# Altium PCB PCB1.PcbDoc
Units mm, origin at the board's own origin, x right, y up, seen from the top; angles counter-clockwise.
Board outline 133.22 x 81.28 mm, 2 copper layers (Top Layer, Bottom Layer); 62 components, 31 nets, 242 pads, 0 vias.
Unrouted connection lines stored in the file: 36.
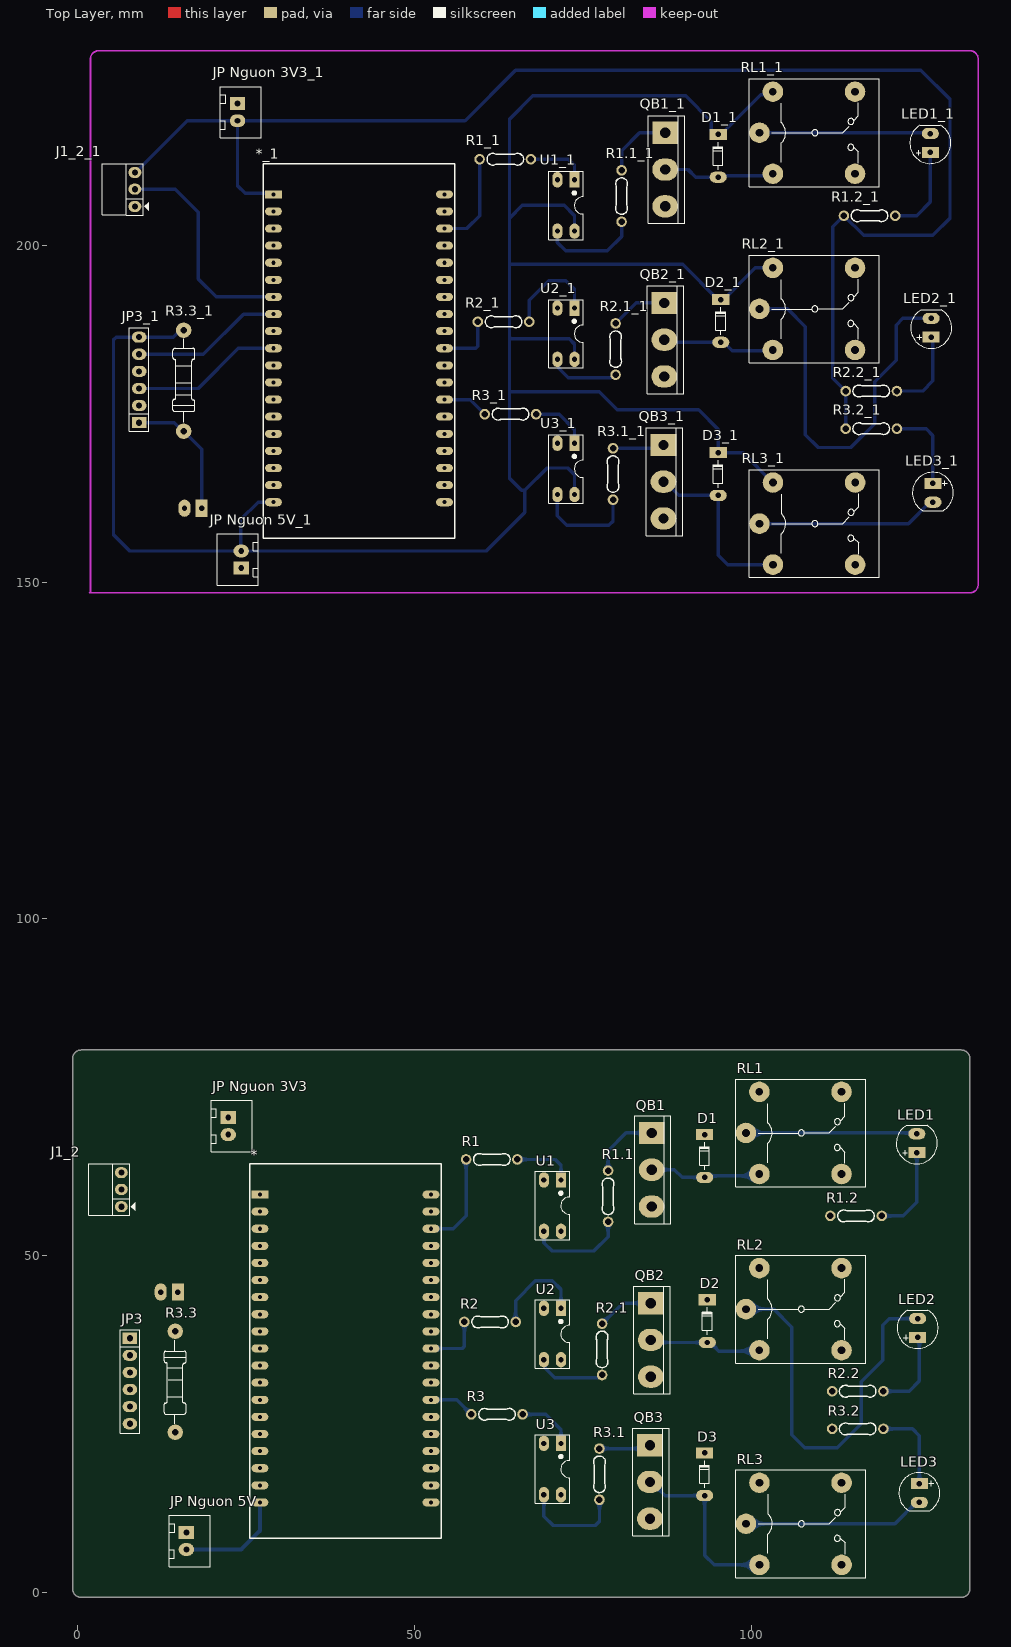
[diagram p0: Top Layer view]
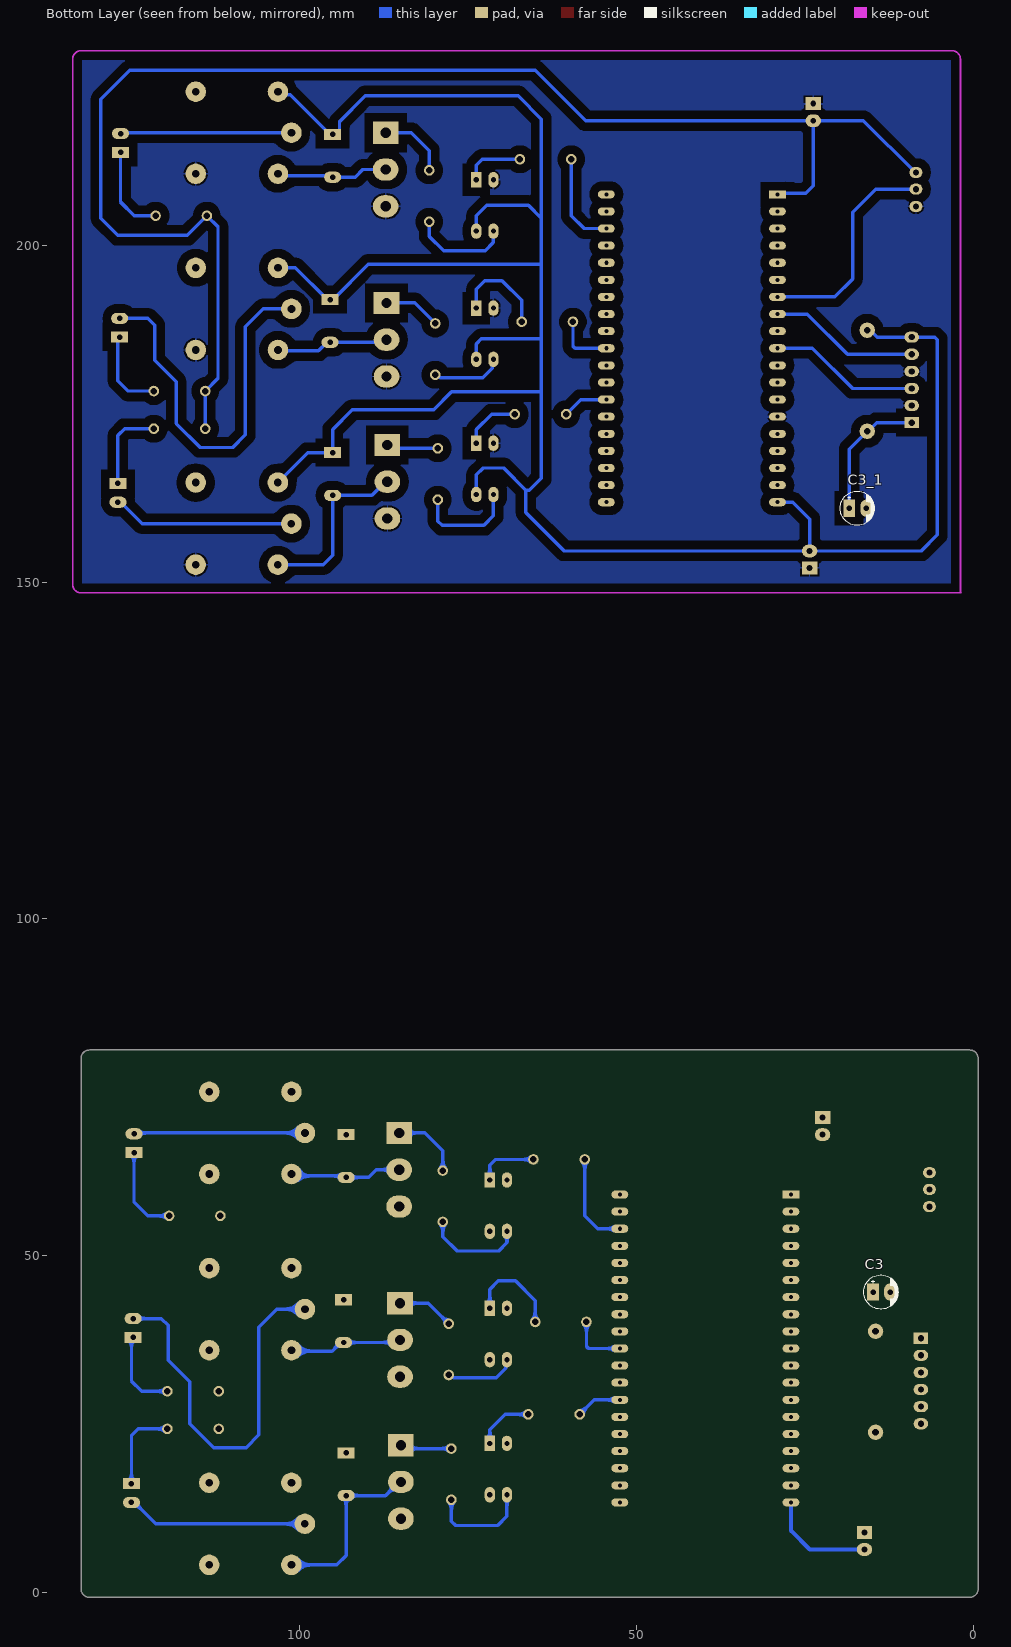
[diagram p1: Bottom Layer view, seen from below]

## Layer stack, top to bottom
Top Solder: solder mask 0.0102, Solder Resist, Dk 3.5
Top Layer: signal copper 0.0356
Dielectric 1: dielectric 0.32, FR-4, Dk 4.8
Bottom Layer: signal copper 0.0356
Bottom Solder: solder mask 0.0102, Solder Resist, Dk 3.5

## Board outline
-0.762,0.508 -0.762,79.248 cw(c0.508,79.248) 0.508,80.518 131.191,80.518 cw(c131.191,79.248) 132.461,79.248 132.461,0.508 cw(c131.191,0.508) 131.191,-0.762 0.508,-0.762 cw(c0.508,0.508)

## Design rules (kind name [scope] priority, off if disabled: settings)
Clearance [All] p1: gap=1.3 ignorepadtopadclearanceinfootprint=FALSE
PolygonConnect [All] p1: connectstyle=Relief reliefconductorwidth=0.254 reliefentries=4 polygonreliefangle="90 Angle" airgapwidth=0.254
RoutingVias [All] p1: holewidth=20 width=35 viastyle="Through Hole" minholewidth=15 minwidth=25 maxholewidth=0.711 maxwidth=0
SolderMaskExpansion [All] p1: expansion=0.102 istentingtop=FALSE
Width [All] p1: maxlimit=1.27 minlimit=0.381 preferedwidth=0.635
30 further rules are at their usual default settings.

## Classes and differential pairs
component class Sheet1: C3 D1 D2 D3 J1_2 JP3 "JP Nguon 3V3" "JP Nguon 5V" LED1 LED2 LED3 QB1 QB2 QB3 R1 R1.1 R1.2 R2 R2.1 R2.2 R3 R3.1 R3.2 R3.3 RL2 RL3 U1 U2 U3

## Components (designator, comment, footprint, x,y, rotation, side; value= is the part's Value field where it differs from the comment)
* "ESP32 DEV KIT" "ESP32 DEVKIT" 27.051,59.055 r0 top
*_1 "ESP32 DEV KIT" "ESP32 DEVKIT" 29.058,207.572 r0 top (schematic designator *)
C3 "220uF" CP1/2 14.859,44.577 r180 bottom value=10uF/50V
C3_1 "220uF" CP1/2 18.39,160.963 r180 bottom value=10uF/50V (schematic designator C3)
D1 "1N4007" D0.5A 93.091,64.77 r270 top
D1_1 "1N4007" D0.5A 95.098,213.287 r270 top (schematic designator D1)
D2 "1N4007" D0.5A 93.472,40.259 r270 top
D2_1 "1N4007" D0.5A 95.479,188.776 r270 top (schematic designator D2)
D3 "1N4007" D0.5A 93.091,17.526 r270 top
D3_1 "1N4007" D0.5A 95.098,166.043 r270 top (schematic designator D3)
J1_2 "DHT11" JP3H 6.477,57.252 r90 top value=J3
J1_2_1 "DHT11" JP3H 8.484,205.769 r90 top value=J3 (schematic designator J1_2)
JP3 "SharpGP2Y10" JP6 7.747,37.719 r270 top value=JP7
JP3_1 "SharpGP2Y10" JP6 9.119,173.663 r90 top value=JP7 (schematic designator JP3)
"JP Nguon 3V3" "JP2" CON2 22.352,70.485 r270 top value="Connector 2"
"JP Nguon 3V3_1" "JP2" CON2 23.724,221.034 r270 top value="Connector 2" (schematic designator "JP Nguon 3V3")
"JP Nguon 5V" "JP2" CON2 16.129,8.89 r270 top value="Connector 2"
"JP Nguon 5V_1" "JP2" CON2 24.271,152.073 r90 top value="Connector 2" (schematic designator "JP Nguon 5V")
LED1 "LED" LED-5TRED 124.587,66.675 r90 top value="LED 3 ly Single Colour"
LED1_1 "LED" LED-5TRED 126.594,215.192 r90 top value="LED 3 ly Single Colour" (schematic designator LED1)
LED2 "LED" LED-5TRED 124.714,39.243 r90 top value="LED 3 ly Single Colour"
LED2_1 "LED" LED-5TRED 126.721,187.76 r90 top value="LED 3 ly Single Colour" (schematic designator LED2)
LED3 "LED" LED-5TRED 124.968,14.732 r270 top value="LED 3 ly Single Colour"
LED3_1 "LED" LED-5TRED 126.975,163.249 r270 top value="LED 3 ly Single Colour" (schematic designator LED3)
QB1 "C1815" QTO-247 85.217,68.199 r270 top value=D718
QB1_1 "C1815" QTO-247 87.224,216.716 r270 top value=D718 (schematic designator QB1)
QB2 "C1815" QTO-247 85.09,42.926 r270 top value=D718
QB2_1 "C1815" QTO-247 87.097,191.443 r270 top value=D718 (schematic designator QB2)
QB3 "C1815" QTO-247 84.963,21.844 r270 top value=D718
QB3_1 "C1815" QTO-247 86.97,170.361 r270 top value=D718 (schematic designator QB3)
R1 "1K" "R 1/4W/300" 57.658,64.262 r0 top
R1.1 "1K" "R 1/4W/300" 78.74,62.611 r270 top
R1.1_1 "1K" "R 1/4W/300" 80.747,211.128 r270 top (schematic designator R1.1)
R1.2 "330" "R 1/4W/300" 119.38,55.88 r180 top
R1.2_1 "330" "R 1/4W/300" 121.387,204.397 r180 top (schematic designator R1.2)
R1_1 "1K" "R 1/4W/300" 59.665,212.779 r0 top (schematic designator R1)
R2 "1K" "R 1/4W/300" 57.404,40.132 r0 top
R2.1 "1K" "R 1/4W/300" 77.851,39.878 r270 top
R2.1_1 "1K" "R 1/4W/300" 79.858,188.395 r270 top (schematic designator R2.1)
R2.2 "330" "R 1/4W/300" 119.634,29.845 r180 top
R2.2_1 "330" "R 1/4W/300" 121.641,178.362 r180 top (schematic designator R2.2)
R2_1 "1K" "R 1/4W/300" 59.411,188.649 r0 top (schematic designator R2)
R3 "1K" "R 1/4W/300" 58.42,26.416 r0 top
R3.1 "1K" "R 1/4W/300" 77.47,21.336 r270 top
R3.1_1 "1K" "R 1/4W/300" 79.477,169.853 r270 top (schematic designator R3.1)
R3.2 "330" "R 1/4W/300" 119.634,24.257 r180 top
R3.2_1 "330" "R 1/4W/300" 121.641,172.774 r180 top (schematic designator R3.2)
R3.3 "150" Res_15mm 14.478,38.749 r270 top value="R1W - 100"
R3.3_1 "150" Res_15mm 15.723,172.393 r90 top value="R1W - 100" (schematic designator R3.3)
R3_1 "1K" "R 1/4W/300" 60.427,174.933 r0 top (schematic designator R3)
RL1 "Relay 5V" RL_SPDT_10A 99.211,68.199 r0 top value="Relay SPDT, 10A, 12V"
RL1_1 "Relay 5V" RL_SPDT_10A 101.218,216.716 r0 top value="Relay SPDT, 10A, 12V" (schematic designator RL1)
RL2 "Relay 5V" RL_SPDT_10A 99.211,42.037 r0 top value="Relay SPDT, 10A, 12V"
RL2_1 "Relay 5V" RL_SPDT_10A 101.218,190.554 r0 top value="Relay SPDT, 10A, 12V" (schematic designator RL2)
RL3 "Relay 5V" RL_SPDT_10A 99.219,10.16 r0 top value="Relay SPDT, 10A, 12V"
RL3_1 "Relay 5V" RL_SPDT_10A 101.226,158.677 r0 top value="Relay SPDT, 10A, 12V" (schematic designator RL3)
U1 "PC817" DIP4/W0.3 71.755,61.214 r180 top
U1_1 "PC817" DIP4/W0.3 73.762,209.731 r180 top (schematic designator U1)
U2 "PC817" DIP4/W0.3 71.755,42.164 r180 top
U2_1 "PC817" DIP4/W0.3 73.762,190.681 r180 top (schematic designator U2)
U3 "PC817" DIP4/W0.3 71.755,22.098 r180 top
U3_1 "PC817" DIP4/W0.3 73.762,170.615 r180 top (schematic designator U3)

## Footprints (in the part's own frame and the unit in brackets; to place one, negate y for a bottom-side part, rotate by r counter-clockwise, add the part's x,y. Pads: shape width x height; smd on the part's side, far side on the other; paste and mask are expansions set on the pad)
CON2 [mil] "CON2"
  rect 75x90 hole 34: 1(0,0)
  oval 75x90 hole 34: 2(100,0)
  silkscreen extent -100,-101 200,140, body extent -68,-70 168,107, height 236
CP1/2 [mil] "Tu hoa < 22uF/16>50V"
  rect 70x100 hole 32: 1(0,0)
  oval 70x100 hole 32: 2(100,0)
  silkscreen extent -53,-100 147,100, body extent -49,-99 149,99, height 287
D0.5A [mil] "Diode muoi, W 80mil, L 300mil"
  oval 65x100 hole 32: 1(125,0)
  rect 65x100 hole 32: 2(-125,0)
  silkscreen extent -80,-30 80,28, body extent -108,-33 108,32, height 61
DIP4/W0.3 [mil] "4 PIN, W 300mil, Pin to pin 100mil"
  rect 60x90 hole 31: 1(0,0)
  oval 60x90 hole 31: 2(100,0) 3(100,300) 4(0,300)
  silkscreen extent -50,-50 150,350, body extent -59,-10 159,305, height 170
"ESP32 DEVKIT" [mm]
  rect 2.5x1.2 hole 0.6: 1(0,0)
  oval 2.5x1.2 hole 0.6: 2(0,-2.54) 3(0,-5.08) 4(0,-7.62) 5(0,-10.16) 6(0,-12.7) 7(0,-15.24) 8(0,-17.78) 9(0,-20.32) 10(0,-22.86) 11(0,-25.4) 12(0,-27.94) 13(0,-30.48) 14(0,-33.02) 15(0,-35.56) 16(0,-38.1) 17(0,-40.64) 18(0,-43.18) 19(0,-45.72) 20(25.4,-45.72) 21(25.4,-43.18) 22(25.4,-40.64) 23(25.4,-38.1) 24(25.4,-35.56) 25(25.4,-33.02) 26(25.4,-30.48) 27(25.4,-27.94) 28(25.4,-25.4) 29(25.4,-22.86) 30(25.4,-20.32) 31(25.4,-17.78) 32(25.4,-15.24) 33(25.4,-12.7) 34(25.4,-10.16) 35(25.4,-7.62) 36(25.4,-5.08) 37(25.4,-2.54) 38(25.4,0)
  silkscreen extent -1.52,-51.05 26.92,4.57, body extent -1.27,-50.99 26.67,4.59, height 9.68
JP3H [mil]
  oval 65x75 hole 36: 1(0,0) 2(101,0) 3(199,0)
  silkscreen extent -50,-81 250,190, body extent -47,-15 245,424, height 99
JP6 [mil] "JP6"
  rect 65x85 hole 36: 1(0,0)
  oval 65x85 hole 36: 2(100,0) 3(200,0) 4(300,0) 5(400,0) 6(500,0)
  silkscreen extent -50,-57 556,58, body extent -48,-50 548,48, height 323
LED-5TRED [mil] "LED 2 PIN, 5 ly , Only colour, pin to pin 110mil"
  rect 65x100 hole 32: 1(-55,0)
  oval 65x100 hole 32: 2(55,0)
  silkscreen extent -120,-120 104,120, body extent -116,-117 98,120, height 339
QTO-247 [mil] "TO-247"
  rect 130x150 hole 60: 1(0,0)
  oval 130x150 hole 60: 2(215,0) 3(430,0)
  silkscreen extent -100,-100 530,113, body extent -89,-78 511,102, height 941
"R 1/4W/300" [mil] "Through hole resitor, axial 300mils, 1/4W"
  round 62 hole 38: 1(0,0) 2(300,0)
  silkscreen extent 44,-35 257,35, body extent -12,-47 312,47, height 97
Res_15mm [mil]
  round 90 hole 39.37: 1(0,0) 2(590.55,0)
  silkscreen extent 53,-65 542,63
RL_SPDT_10A [mil] "Relay SPDT, 5 pin, 10A,W 650mil, L 800mil, H 800mil"
  round 120 hole 45: 1(0,0) 2(559.06,240) 3(559.06,-240) 4(78.74,-240) 5(78.74,240)
  silkscreen extent -60,-315 700,315, body extent -56,-315 701,315, height 606

## Part data
C3 C3_1: library part CP1, "Cap P  0,1uF < 22uF , 16 - 50V", Description 1="10 => 220uF/6,3V/10V - 10uF => 100uF/16V", Description 2="0,1uF => 33uF/50V - 10uF => 22uF/63V", Description 3="0,47uF => 10uF/100V"
D1 D1_1 D2 D2_1 D3 D3_1: library part D1A, "Diode 1A"
J1_2 J1_2_1: library part JP3, "Jumper 3"
JP3 JP3_1: library part JP6, "JP6 PIN"
"JP Nguon 3V3" "JP Nguon 3V3_1" "JP Nguon 5V" "JP Nguon 5V_1": library part Con2, "Connector 2"
LED1 LED1_1 LED2 LED2_1 LED3 LED3_1: "LED Single colour Green and Red"
QB1 QB1_1 QB2 QB2_1 QB3 QB3_1: library part D718, "Transistor Power Supply"
R1 R1.1 R1.1_1 R1.2 R1.2_1 R1_1 R2 R2.1 R2.1_1 R2.2 R2.2_1 R2_1 R3 R3.1 R3.1_1 R3.2 R3.2_1 R3_1: library part Resistor, "Resistor"
R3.3 R3.3_1: library part R1W, "Resistor 1W"
RL1 RL1_1 RL2 RL2_1 RL3 RL3_1: library part "Relay 1", "Relay SPDT,10A - 12VDC 5 Pin"
U1 U1_1 U2 U2_1 U3 U3_1: "Single Opto"

## Nets (pads, with @x,y where several pads share a name; then routed paths per layer and width w, separated by ;. In a path a pad name is that pad's centre, name@x,y a point inside that pad or via, vN(x,y) a via of type N, cw(c..) or ccw(c..) an arc to the next point about the centre after c; other vN are vias at no path point)
3V3: "JP Nguon 3V3.2" *.1 J1_2.3 R1.2.2 R2.2.2 R3.2.2
5V: "JP Nguon 5V.2" *.19 D1.2 D2.2 D3.2 JP3.6 R3.3.2 RL1.5 RL2.5 RL3.5 U1.4 U2.4 U3.4 | length 16.3
  Bottom Layer w0.635: 16.129,6.35 24.257,6.35 27.051,9.144 *.19
COM1: LED1.2 RL1.1 | length 25.6
  Bottom Layer w0.508: RL1.1@99.275,68.135 RL1.1 124.46,68.199 cw(c124.46,68.072) LED1.2 LED1.2@124.523,68.135
COM2: LED2.2 RL2.1 | length 58
  Bottom Layer w0.508: RL2.1 103.378,42.037 106.045,39.37 106.045,23.368 107.95,21.463 112.776,21.463 116.332,25.019 116.332,31.242 119.507,34.417 119.507,39.624 120.523,40.64 LED2.2
COM3: LED3.2 RL3.1 | length 27.1
  Bottom Layer w0.508: RL3.1 121.349,10.16 124.523,13.335 LED3.2
Data: *.7 J1_2.2
GND3: "JP Nguon 3V3.1" "JP Nguon 5V.1" *.14 C3.2 J1_2.1 JP3.2 JP3.4 QB1.3 QB2.3 QB3.3 RL1.3 RL2.3 RL3.3 U1.2 U2.2 U3.2
LED: *.10 JP3.3
LED_DUST: *.26 R3.1 | length 7.4
  Bottom Layer w0.508: *.26@51.943,28.575 *.26 56.261,28.575 R3.1
LED_HUM: *.29 R2.1 | length 9.2
  Bottom Layer w0.508: *.29@51.943,36.195 *.29 57.106,36.195 57.404,36.493 R2.1
LED_TEMP: *.36 R1.1 | length 14.9
  Bottom Layer w0.508: *.36@51.943,53.975 *.36 55.753,53.975 57.658,55.88 R1.1
NC1: RL1.2
NC2: RL2.2
NC3: RL3.2
NetD1_1: D1.1 QB1.2 RL1.4 | length 16.7
  Bottom Layer w0.508: QB1.2 88.601,62.738 89.744,61.595 D1.1 93.31,61.814 100.922,61.814 RL1.4
NetD2_1: D2.1 QB2.2 RL2.4 | length 16.9
  Bottom Layer w0.508: QB2.2 85.471,37.084 93.916,37.084 95.186,35.814 101.084,35.814 RL2.4
NetD3_1: D3.1 QB3.2 RL3.4 | length 26.8
  Bottom Layer w0.508: QB3.2 85.217,16.383 87.249,14.351 D3.1 93.091,5.461 94.488,4.064 RL3.4 ; QB3.2@84.963,17.145 QB3.2@85.217,17.145
NetLED1_1: LED1.1 R1.2.1 | length 13.4
  Bottom Layer w0.508: R1.2.1 122.555,55.88 124.587,57.912 LED1.1
NetLED2_1: LED2.1 R2.2.1 | length 12.5
  Bottom Layer w0.508: R2.2.1 123.444,29.845 124.968,31.369 124.968,37.592 LED2.1
NetLED3_1: LED3.1 R3.2.1 | length 12.9
  Bottom Layer w0.508: R3.2.1 123.952,24.257 124.968,23.241 LED3.1
NetQB1_1: QB1.1 R1.1.1 | length 10.5
  Bottom Layer w0.508: R1.1.1 78.74,65.532 81.407,68.199 QB1.1
NetQB2_1: QB2.1 R2.1.1 | length 8.5
  Bottom Layer w0.508: R2.1.1 80.899,42.926 QB2.1
NetQB3_1: QB3.1 R3.1.1 | length 8
  Bottom Layer w0.508: R3.1.1 84.455,21.336 QB3.1 ; QB3.1@84.753,22.816 QB3.1@84.963,22.606
NetR1.1_2: R1.1.2 U1.3 | length 14.8
  Bottom Layer w0.508: U1.3 69.215,51.901 70.443,50.673 76.623,50.673 78.74,52.79 R1.1.2
NetR1_2: R1.2 U1.1 | length 9
  Bottom Layer w0.508: R1.2 70.866,64.262 71.755,63.373 U1.1
NetR2.1_2: R2.1.2 U2.3 | length 10.6
  Bottom Layer w0.508: U2.3 69.409,34.35 69.409,33.233 70.796,31.847 77.151,31.847 77.562,32.258 R2.1.2
NetR2_2: R2.2 U2.1 | length 14.4
  Bottom Layer w0.508: R2.2 65.024,43.307 67.945,46.228 70.485,46.228 71.755,44.958 U2.1
NetR3.1_2: R3.1.2 U3.3 | length 15.4
  Bottom Layer w0.508: U3.3 69.215,11.303 70.612,9.906 76.835,9.906 77.47,10.541 R3.1.2
NetR3_2: R3.2 U3.1 | length 8.7
  Bottom Layer w0.508: R3.2 69.469,26.416 71.755,24.13 U3.1
res: C3.1 JP3.1 R3.3.1
V0: *.8 JP3.5
pads on no net: "JP Nguon 3V3_1.1" "JP Nguon 3V3_1.2" "JP Nguon 5V_1.1" "JP Nguon 5V_1.2" *.2 *.3 *.4 *.5 *.6 *.9 *.11 *.12 *.13 *.15 *.16 *.17 *.18 *.20 *.21 *.22 *.23 *.24 *.25 *.27 *.28 *.30 *.31 *.32 *.33 *.34 *.35 *.37 *.38 *_1.1 *_1.2 *_1.3 *_1.4 *_1.5 *_1.6 *_1.7 *_1.8 *_1.9 *_1.10 *_1.11 *_1.12 *_1.13 *_1.14 *_1.15 *_1.16 *_1.17 *_1.18 *_1.19 *_1.20 *_1.21 *_1.22 *_1.23 *_1.24 *_1.25 *_1.26 *_1.27 *_1.28 *_1.29 *_1.30 *_1.31 *_1.32 *_1.33 *_1.34 *_1.35 *_1.36 *_1.37 *_1.38 C3_1.1 C3_1.2 D1_1.1 D1_1.2 D2_1.1 D2_1.2 D3_1.1 D3_1.2 J1_2_1.1 J1_2_1.2 J1_2_1.3 JP3_1.1 JP3_1.2 JP3_1.3 JP3_1.4 JP3_1.5 JP3_1.6 LED1_1.1 LED1_1.2 LED2_1.1 LED2_1.2 LED3_1.1 LED3_1.2 QB1_1.1 QB1_1.2 QB1_1.3 QB2_1.1 QB2_1.2 QB2_1.3 QB3_1.1 QB3_1.2 QB3_1.3 R1.1_1.1 R1.1_1.2 R1.2_1.1 R1.2_1.2 R1_1.1 R1_1.2 R2.1_1.1 R2.1_1.2 R2.2_1.1 R2.2_1.2 R2_1.1 R2_1.2 R3.1_1.1 R3.1_1.2 R3.2_1.1 R3.2_1.2 R3.3_1.1 R3.3_1.2 R3_1.1 R3_1.2 RL1_1.1 RL1_1.2 RL1_1.3 RL1_1.4 RL1_1.5 RL2_1.1 RL2_1.2 RL2_1.3 RL2_1.4 RL2_1.5 RL3_1.1 RL3_1.2 RL3_1.3 RL3_1.4 RL3_1.5 U1_1.1 U1_1.2 U1_1.3 U1_1.4 U2_1.1 U2_1.2 U2_1.3 U2_1.4 U3_1.1 U3_1.2 U3_1.3 U3_1.4
copper on no net: | length 998.9
  Bottom Layer w0.508: 8.484,208.334 14.453,208.334 17.882,204.905 17.882,194.999 20.549,192.332 28.55,192.332 ; 8.484,210.823 8.611,210.823 16.281,218.494 23.724,218.494 ; 9.119,173.663 14.298,173.663 15.568,172.393 15.723,172.393 18.39,169.726 18.39,160.963 ; 9.119,178.743 17.882,178.743 23.851,184.712 28.55,184.712 ; 9.119,183.823 18.644,183.823 24.613,189.792 28.55,189.792 ; 15.723,187.393 15.241,187.393 14.211,186.363 5.69,186.363 5.309,185.982 5.309,157.026 7.722,154.613 24.271,154.613 ; 28.55,161.852 26.772,161.852 24.232,159.312 24.232,154.653 24.271,154.613 ; 29.058,207.572 28.931,207.699 24.867,207.699 23.724,208.842 23.724,218.494 ; 53.95,177.092 54.458,177.092 58.268,177.092 60.427,174.933 ; 53.95,184.712 54.458,184.712 59.113,184.712 59.411,185.01 59.411,188.649 ; 53.95,202.492 54.458,202.492 57.76,202.492 59.665,204.397 59.665,212.779 ; 67.031,188.649 67.031,191.824 69.952,194.745 72.492,194.745 73.762,193.475 73.762,190.681 ; 67.285,212.779 72.873,212.779 73.762,211.89 73.762,209.731 ; 68.047,174.933 71.476,174.933 73.762,172.647 73.762,170.615 ; 71.222,162.995 71.222,159.82 72.619,158.423 78.842,158.423 79.477,159.058 79.477,162.233 ; 71.222,183.061 71.416,182.867 71.416,181.751 72.802,180.364 79.158,180.364 79.569,180.775 79.858,180.775 ; 71.222,202.111 71.222,200.418 72.449,199.19 78.63,199.19 80.747,201.307 80.747,203.508 ; 73.762,162.995 73.762,165.916 72.746,166.932 69.698,166.932 66.396,163.63 ; 73.762,183.061 73.762,185.347 73,186.109 64.364,186.109 64.11,186.363 ; 73.762,202.111 73.762,204.397 72.238,205.921 66.015,205.921 64.11,204.016 ; 79.477,169.853 86.462,169.853 86.97,170.361 ; 79.858,188.395 82.906,191.443 87.097,191.443 ; 80.747,211.128 80.747,214.049 83.414,216.716 87.224,216.716 ; 86.759,171.334 86.97,171.123 ; 86.97,164.9 87.224,164.9 89.256,162.868 95.098,162.868 95.098,153.978 96.495,152.581 103.226,152.581 ; 86.97,165.662 87.224,165.662 ; 87.097,185.982 87.478,185.601 95.923,185.601 97.193,184.331 103.091,184.331 103.218,184.458 ; 87.224,211.255 90.608,211.255 91.751,210.112 95.098,210.112 95.316,210.331 102.928,210.331 103.218,210.62 ; 101.218,190.554 105.385,190.554 108.052,187.887 108.052,171.885 109.957,169.98 114.783,169.98 118.339,173.536 118.339,179.759 121.514,182.934 121.514,188.141 122.53,189.157 126.721,189.157 ; 101.226,158.677 123.355,158.677 126.53,161.852 126.975,161.852 ; 101.281,216.653 101.218,216.716 126.467,216.716 cw(c126.467,216.589) 126.594,216.589 126.53,216.653 ; 103.218,196.65 100.622,196.65 95.923,191.951 95.479,191.951 95.034,191.951 89.827,197.158 64.11,197.158 ; 103.218,222.812 102.732,222.326 101.406,222.326 95.542,216.462 95.098,216.462 94.653,216.462 94.082,217.034 94.082,218.367 90.272,222.177 67.539,222.177 64.11,218.748 64.11,204.016 ; 103.226,164.773 98.781,169.218 95.098,169.218 95.098,172.647 92.177,175.568 80.112,175.568 77.445,178.235 64.11,178.235 ; 114.021,172.774 114.021,178.362 112.116,180.267 112.116,202.746 113.767,204.397 116.688,201.476 126.975,201.476 129.515,204.016 129.515,221.669 125.197,225.987 64.999,225.987 57.506,218.494 23.724,218.494 ; 121.387,204.397 124.562,204.397 126.594,206.429 126.594,213.795 ; 121.641,172.774 125.959,172.774 126.975,171.758 126.975,164.646 ; 121.641,178.362 125.451,178.362 126.975,179.886 126.975,186.109 126.721,186.363 ; 24.271,154.613 60.681,154.613 66.396,160.328 66.396,163.63 ; 64.11,178.235 64.11,165.408 65.888,163.63 66.396,163.63 ; 64.11,178.235 64.11,186.109 64.11,186.363 ; 64.11,186.363 64.11,197.158 ; 64.11,197.158 64.11,204.016

## Polygon pours and split planes (outlines as drawn)
no net on Bottom Layer "NONET_L02_P003" (solid, remove dead copper, pour order 3): 1.88,149.152 1.88,227.638 cw(c3.15,227.638) 3.15,228.908 132.69,228.908 cw(c132.69,227.765) 133.833,227.765 133.833,149.533 cw(c132.563,149.533) 132.563,148.263 2.769,148.263 cw(c2.769,149.152)

## Keep-outs
Keep-Out Layer:
  lines w0.254: 1.753,148.39 ccw(c1.753,148.517) 1.88,148.517 ; 1.88,148.517 ccw(c2.007,148.517) 2.007,148.39 132.436,148.39 ccw(c132.436,149.66) 133.706,149.66 133.706,227.638 ccw(c132.436,227.638) 132.436,228.908 3.15,228.908 ccw(c3.15,227.638) 1.88,227.638 1.88,148.517